# Altium PCB PCB.PcbDoc
Units mm, origin at the board's own origin, x right, y up, seen from the top; angles counter-clockwise.
Board outline 16 x 10 mm, 2 copper layers (Top Layer, Bottom Layer), stack 1.56 mm thick; 7 components, 4 nets, 15 pads, 12 vias.
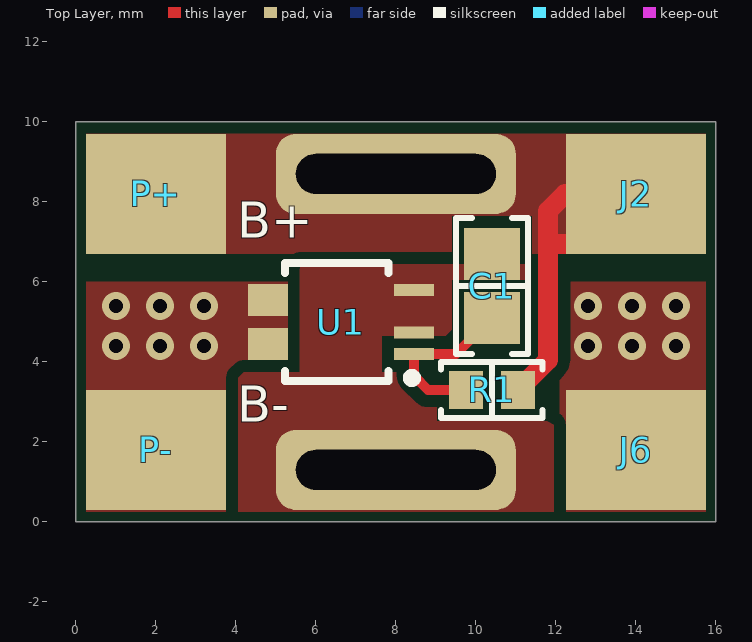
[diagram p0: Top Layer view]
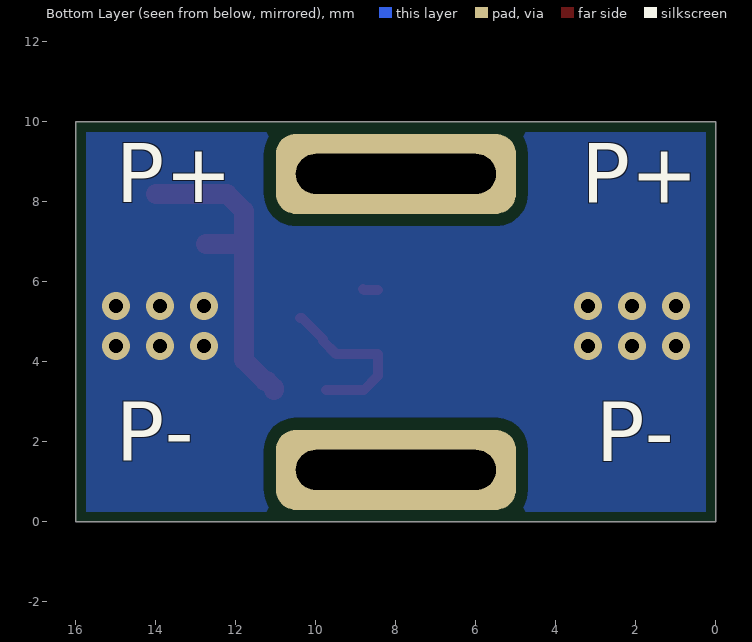
[diagram p1: Bottom Layer view, seen from below]

## Layer stack, top to bottom
Top Solder: solder mask 0.02, Solder Resist, Dk 3.5
Top Layer: signal copper 0.03
Dielectric 1: dielectric 1.5, FR-4, Dk 4.8
Bottom Layer: signal copper 0.03
Bottom Solder: solder mask 0.02, Solder Resist, Dk 3.5

## Board outline
0,0 0,10 16,10 16,0

## Design rules (kind name [scope] priority, off if disabled: settings)
AcuteAngle [All] p1: minimum=6.00000000000000E+0001 checktracksonly=TRUE
AssemblyTestPointUsage [(not InNetClass('NOTESTPOINTS'))] p1: allowmultiple=TRUE
AssemblyTestPointUsage AssemblyTestPointUsageN [InNetClass('NOTESTPOINTS')] p2: valid=2 allowmultiple=TRUE
AssemblyTestpoint [All] p1: testpointundercomponent=TRUE minsize=0.8 maxsize=2 preferedsize=1 minholesize=0 maxholesize=0.35 preferedholesize=0 testpointgrid=1.27 usegrid=FALSE gridoriginx=87.5 gridoriginy=62.5 gridtolerance=0 allowsidetop=TRUE minspacing=2.54 // Zollner
BoardOutlineClearance BoardCopperOutlineClearance [(OnLayer('Top Layer') OR OnLayer('Bottom Layer') )] p1: gap=0.5 ignorepadtopadclearanceinfootprint=FALSE except(0.25: Poly-OutlineEdge; 1: Region-OutlineEdge; 1.5: SMDPad-OutlineEdge THPad-OutlineEdge)
Clearance PadToViaClearance [IsVia and not IsComponentVia vs IsPad] p1: gap=0.025 ignorepadtopadclearanceinfootprint=TRUE
Clearance "Clearance NOTSELV-SELV" [InNetClass('NOTSELV') vs NOT InNetClass('NOTSELV')] p2: gap=6 ignorepadtopadclearanceinfootprint=FALSE // according to previous calio PCB
Clearance "Clearance (FAB)" [All] p3: gap=0.203 ignorepadtopadclearanceinfootprint=TRUE except(0.305: Arc-Poly Track-Poly SMDPad-Poly THPad-Poly Via-Poly Fill-Poly Poly-Poly)
ComponentClearance ComponentClearance_NetTie [((ObjectKind = 'Component') And (ComponentType = 'Net Tie')) Or (Footprint = 'StarPoint') Or (Footprint like 'NetTieVia*')] p1: gap=-3.81 collisioncheckmode=3 verticalgap=-3.81 showdistances=FALSE
ComponentClearance [All] p2: gap=0.254 collisioncheckmode=3 verticalgap=0.254 showdistances=FALSE
DiffPairsRouting [All] p1: maxlimit=1.27 minlimit=0.203 mostfreqgap=0.203 toplayer_minwidth=0.152 toplayer_maxwidth=2.54 toplayer_prefwidth=0.254 bottomlayer_minwidth=0.152 bottomlayer_maxwidth=2.54 bottomlayer_prefwidth=0.254 maxuncoupledlength=12.7
FabricationTestPointUsage [All] p1: valid=2 allowmultiple=FALSE
FabricationTestpoint [All] p1: side=3 testpointundercomponent=TRUE minsize=1.016 maxsize=2.54 preferedsize=1.524 minholesize=0 maxholesize=1.016 preferedholesize=0.813 testpointgrid=0.025 allowsidetop=TRUE allowsidebottom=TRUE usegrid=FALSE gridtolerance=0
HoleSize [All] p1: absolutevalues=TRUE maxlimit=6.35 minlimit=0.3 maxpercent=80.000 minpercent=20.000 // Zollner
HoleToHoleClearance HoleToHoleClearance_NetTieVia [InPadClass('NetTieVias') vs InPadClass('NetTieVias')] p1: gap=0 allowstackedmicrovias=TRUE
HoleToHoleClearance [All] p2: gap=0.25 allowstackedmicrovias=TRUE // Zollner
MinimumAnnularRing [All] p1: minimumring=0.15 // PCBWAY
MinimumSolderMaskSliver [All] p1: minsoldermaskwidth=0.2 // Zollner
PlaneClearance PlaneClearance_1 [All] p1: clearance=0.508
PlaneConnect [All] p1: planeconnectstyle=Direct reliefexpansion=0.508 reliefentries=4 reliefconductorwidth=0.254 reliefairgap=0.254
PolygonConnect [All] p1: connectstyle=Direct reliefconductorwidth=0.254 reliefentries=4 polygonreliefangle="90 Angle" airgapwidth=0.254
RoutingVias [All] p1: holewidth=0.35 width=0.7 viastyle="Through Hole" minholewidth=0.3 minwidth=0.6 maxholewidth=1.27 maxwidth=1.27
SMDEntry [not IsTestpoint] p1: side=TRUE corner=TRUE anyangle=FALSE
SMDNeckDown [not IsTestpoint] p1: percent=90.000
SMDToCorner [All] p1: distance=10000
SMDToPlane [All] p1: distance=0
ShortCircuit [All vs not IsBoardCutoutRegion] p1: allowed=FALSE
SilkToSolderMaskClearance [IsPad] p1: minsilkscreentomaskgap=0.127 clearancetoexposedcopper=TRUE
SolderMaskExpansion [All] p1: expansion=0.05 istentingtop=FALSE // Zollner
SolderMaskExpansion SolderMaskExpansionToHoles [All] p2: expansion=0.1 istentingtop=FALSE soldermaskfromhole=TRUE // Zollner
SupplyNets "Schematic Supply Nets_2" [InNet('BAT+')] p1: voltage=0.000
SupplyNets "Schematic Supply Nets_1" [InNet('BAT-')] p2: voltage=0.000
SupplyNets "Schematic Supply Nets" [InNet('OUT-')] p3: voltage=0.000
UnRoutedNet [All] p1: checkbadconnections=TRUE
Width [All] p1: maxlimit=12.7 minlimit=0.203 preferedwidth=0.254
16 further rules are at their usual default settings.

## Components (designator, comment, footprint, x,y, rotation, side; value= is the part's Value field where it differs from the comment)
C1 "0.1 µF" "CAP 0805_2012" 10.4,5.9 r270 top
J2 "3MMx3.5MM" PAD_WITHOUT_HOLE_3X3.5MM#1 11.75,8.05 r90 top
J6 "3MMx3.5MM" PAD_WITHOUT_HOLE_3X3.5MM#2 12,2 r90 top
P+ "3MMx3.5MM" PAD_WITHOUT_HOLE_3X3.5MM#3 2.15,8.15 r90 top (schematic designator J5)
P- "3MMx3.5MM" PAD_WITHOUT_HOLE_3X3.5MM#4 12.875,-6.225 r90 top (schematic designator J3)
R1 "1 kOhms" "RES 0603_1608" 10.4,3.3 r180 top
U1 "XB7608A" "PCB - LEADED - XYSEMI CPC5" 6.6,5 r90 top

## Footprints (in the part's own frame and the unit in brackets; to place one, negate y for a bottom-side part, rotate by r counter-clockwise, add the part's x,y. Pads: shape width x height; smd on the part's side, far side on the other; paste and mask are expansions set on the pad)
"CAP 0805_2012" [mm] "Chip Capacitor, 2-Leads, Body 2.00x1.20mm, IPC Medium Density"
  rect 1.3x1.4 smd: 1(-0.8,0) 2(0.8,0)
  silkscreen extent -1.7,-0.9 1.7,0.9, body extent -1,-0.64 1,0.64, height 1.26
PAD_WITHOUT_HOLE_3X3.5MM#1 [mm]
  rect 3x3.5 smd: 1(0.15,-2.25)
PAD_WITHOUT_HOLE_3X3.5MM#2 [mm]
  rect 3x3.5 smd: 1(-0.2,-2)
PAD_WITHOUT_HOLE_3X3.5MM#3 [mm]
  rect 3x3.5 smd: 1(0.05,0.15)
PAD_WITHOUT_HOLE_3X3.5MM#4 [mm]
  rect 3x3.5 smd: 1(8.025,10.875)
"PCB - LEADED - XYSEMI CPC5" [mm] "POD-CPC5"
  rect 0.3x1 smd: 1(-0.798,-1.847) 2(-0.268,-1.847) 3(0.792,-1.847)
  rect 0.8x1 smd: 4(0.542,1.803) 5(-0.548,1.803)
  silkscreen extent -1.5,-1.9 1.47,1.37, body extent -1.35,-2.01 1.35,2.16, height 1.05
"RES 0603_1608" [mm] "Chip Resistor, 2-Leads, Body 1.60x0.80mm, IPC Medium Density"
  rect 0.85x0.95 smd: 1(-0.65,0) 2(0.65,0)
  silkscreen extent -1.27,-0.7 1.27,0.7, body extent -0.8,-0.4 0.8,0.4, height 0.45

## Part data
C1: library part CC0805MRX7R9BB104, "CAP CER 0.1UF 50V X7R 0805", Device Package="0805 (2012 Metric)", Manufacturer=Yageo, Operating Temperature="-55°C ~ 125°C", Supplier Part Number 1=311-4351-1-ND, Temperature Coefficient=X7R, Tolerance=±20%, Voltage - Rated=50V, Applications="General Purpose", Capacitance="0.1 µF", ComponentLink1Description=Datasheet, ComponentLink1URL=https://www.yageo.com/upload/media/product/productsearch/datasheet/mlcc/UPY-GPHC_X7R_6.3V-to-50V_18.pdf, ComponentLink2Description="DigiKey Link", ComponentLink2URL=https://www.digikey.com/en/products/detail/yageo/CC0805MRX7R9BB104/5884281, id=18, LastUpdated=2023-01-03T20:10:55.763, Lifecycle Status=Active, Minimum Order=1, Mounting Type="Surface Mount, MLCC", Package / Case="0805 (2012 Metric)", Packaging=TapeAndReel, Part Number=CC0805MRX7R9BB104, Part Status=Active, PartId=2475, Price=0.02, Series=CC, Size / Dimension="0.079\" L x 0.049\" W (2.00mm x 1.25mm)", Supplier 1=DigiKey, Thickness (Max)="0.037\" (0.95mm)"
J2 J6 P+ P-: library part PAD_WITHOUT_HOLE_3X3.5MM, "High: 3mm Length: 3.5mm"
R1: library part RNCF0603DTC1K00, "RES SMD 1K OHM 0.5% 1/6W 0603", Device Package="0603 (1608 Metric)", Manufacturer="Stackpole Electronics Inc", Operating Temperature="-55°C ~ 155°C", Power (Watts)="0.167W, 1/6W", Ratings=AEC-Q200, Supplier Device Package=0603, Supplier Part Number 1=738-RNCF0603DTC1K00CT-ND, Temperature Coefficient=±50ppm/°C, Tolerance=±0.5%, ComponentLink1Description=Datasheet, ComponentLink1URL=https://www.seielect.com/catalog/sei-rncf.pdf, ComponentLink2Description="DigiKey Link", ComponentLink2URL=https://www.digikey.com/en/products/detail/stackpole-electronics-inc/RNCF0603DTC1K00/1707978, Composition="Thin Film", Features="Automotive AEC-Q200", Height - Seated (Max)="0.022\" (0.55mm)", id=21542, LastUpdated=2023-11-05T20:36:09.117, Lifecycle Status=Active, Minimum Order=1, Number Of Terminations=2, Package / Case="0603 (1608 Metric)", Packaging=TapeAndReel, Part Number=RNCF0603DTC1K00, PartId=83802, Price=0.01, Resistance="1 kOhms", Series=RNCF, Size / Dimension="0.061\" L x 0.031\" W (1.55mm x 0.80mm)", Supplier 1=DigiKey
U1: "CPC-5 Battery Management IC"

## Free pads (board coordinates)
  rrect50% 6x2 hole 1 slot 5 at 0 deg: 9(8,1.3) 9(8,8.7)

## Via types
v1: diameter 0.7, hole 0.35, Top Layer to Bottom Layer, 12 vias

## Nets (pads, with @x,y where several pads share a name; then routed paths per layer and width w, separated by ;. In a path a pad name is that pad's centre, name@x,y a point inside that pad or via, vN(x,y) a via of type N, cw(c..) or ccw(c..) an arc to the next point about the centre after c; other vN are vias at no path point)
BAT+: J2.1 P+.1 pad.9@8,8.7 R1.1 | length 7.8
  Top Layer w0.5: R1.1 11.05,3.35 11.225,3.525 11.275,3.525 11.8,4.05 11.8,7.775 12.225,8.2 J2.1 ; 12.093,6.95 J2.1@12.75,6.95
BAT-: C1.1 pad.9@8,1.3 U1.2 U1.3 | length 0.4
  Top Layer w0.25: U1.3 8.797,5.792 8.822,5.817 U1.3@8.822,5.82
NetC1_2: C1.2 R1.2 U1.1 | length 4.4
  Top Layer w0.25: R1.2 8.8,3.3 8.447,3.653 U1.1 9.502,4.202 9.825,4.525 9.825,4.575 10.35,5.1 C1.2
OUT-: J6.1 P-.1 U1.4 U1.5
  other v1: 1,4.4 2.1,4.4 3.2,4.4 12.8,4.4 13.9,4.4 15,4.4 1,5.4 2.1,5.4 3.2,5.4 12.8,5.4 13.9,5.4 15,5.4

## Polygon pours and split planes (outlines as drawn)
BAT+ on Top Layer "BAT+_L01_P001" (solid, remove dead copper, pour order 1): 0.2,9.7 15.8,9.7 15.8,6.7 0.2,6.7
BAT- on Top Layer "BAT-_L01_P000" (solid, remove dead copper, pour order 0): 0,0 0,6.447 16,6.447 16,0
OUT- on Top Layer "OUT-_L01_P004" (solid, remove dead copper, pour order 4): 16,6 12.093,6 12.093,0 16,0
OUT- on Top Layer "OUT-_L01_P003" (solid, remove dead copper, pour order 3): 5.4,6 0,6 0,0 5.4,0
OUT- on Bottom Layer "OUT-_L02_P002" (solid, remove dead copper, pour order 2): 0,10 0,0 16,0 16,10

## Silkscreen, mask and mechanical layers (free items; w line width, h text height)
Top Overlay:
  text "B+" at 4.03,6.8 h1.54
  text "B-" at 4.03,2.2 h1.54
Bottom Overlay:
  text "P+" at 15,7.5 h2.52
  text "P-" at 15,1.044 h2.52
Board outline:
  the board outline again, w0.2

## Dimensions
0,0 to 16,0 on Board outline
16,10 to 16,0 on Board outline